# Altium PCB PCB-MM-08-FPS-400 - SDW.PcbDoc
Units mm, origin at the board's own origin, x right, y up, seen from the top; angles counter-clockwise.
Board outline 57.02 x 82.04 mm, 2 copper layers (Top Layer, Bottom Layer); 81 components, 58 nets, 262 pads, 80 vias.
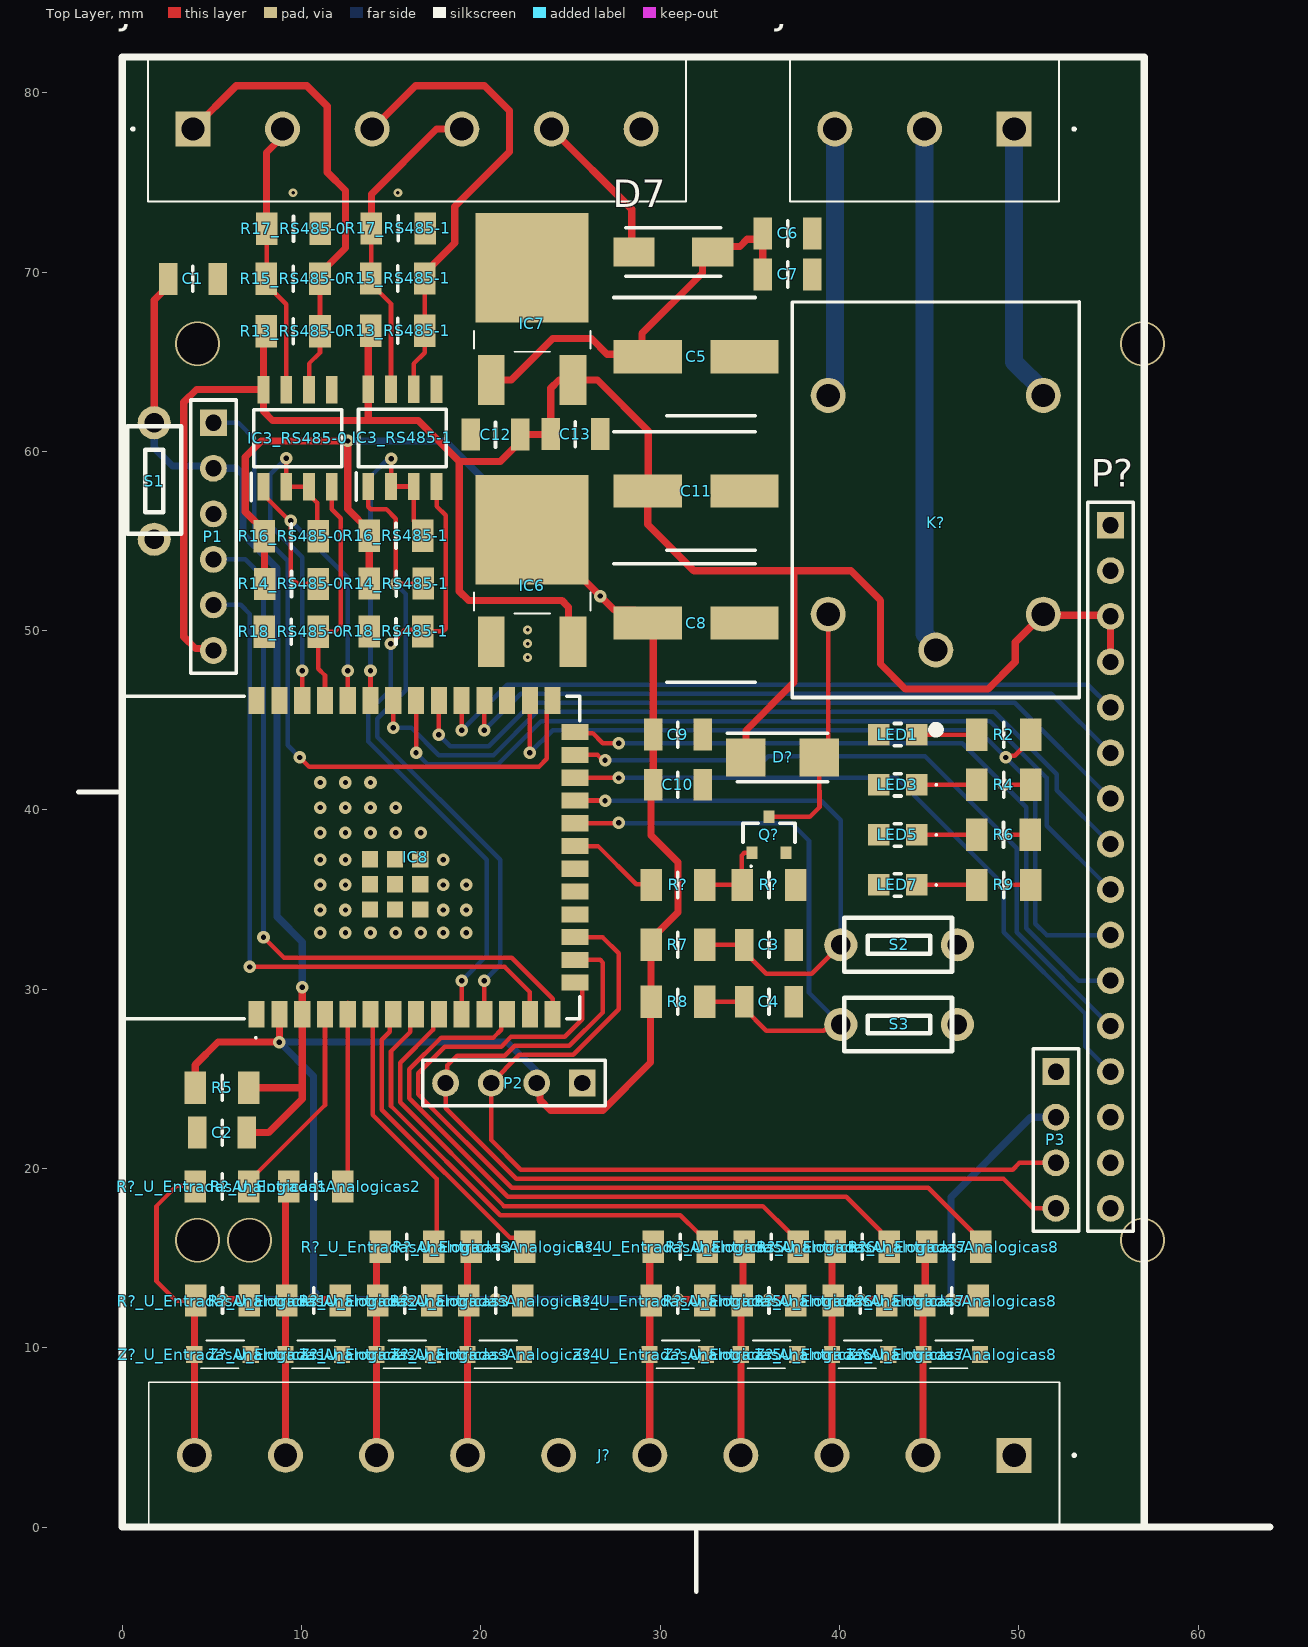
[diagram p0: Top Layer view]
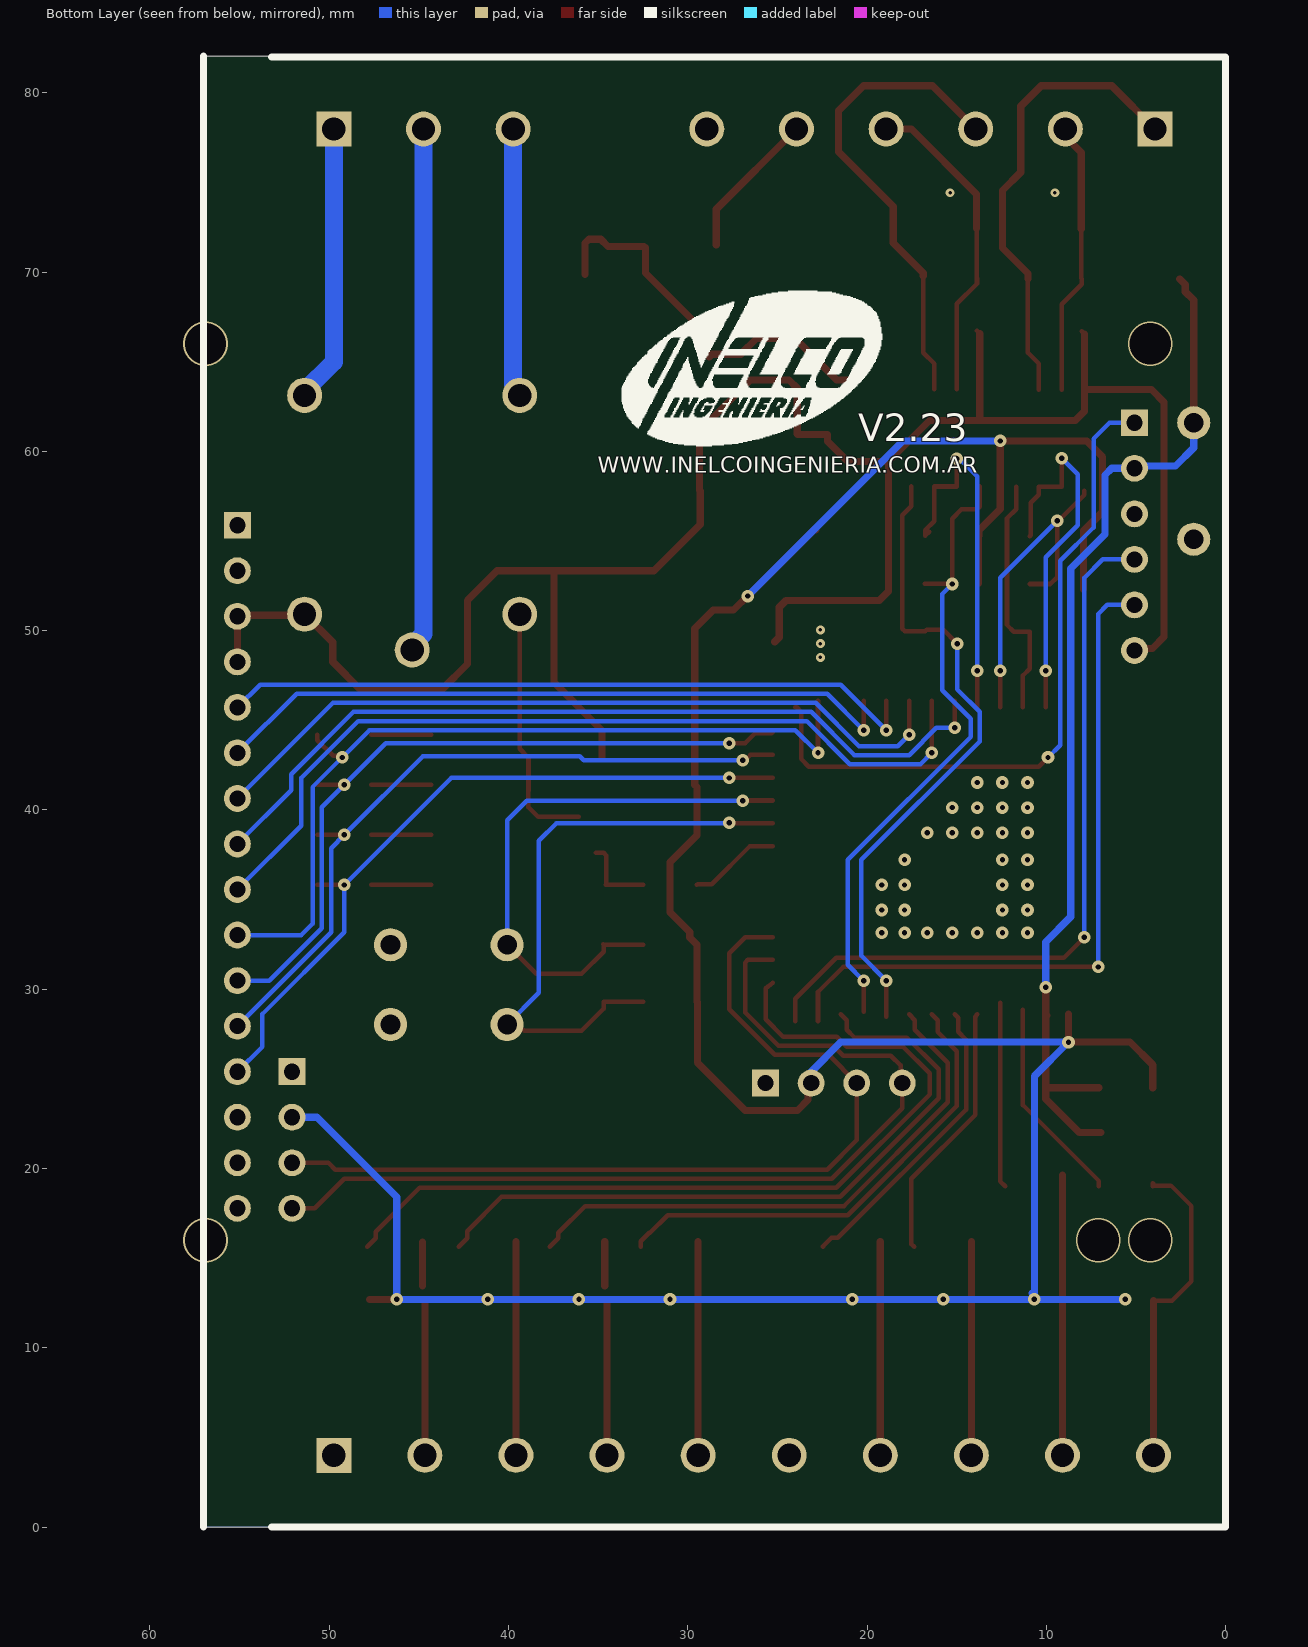
[diagram p1: Bottom Layer view, seen from below]
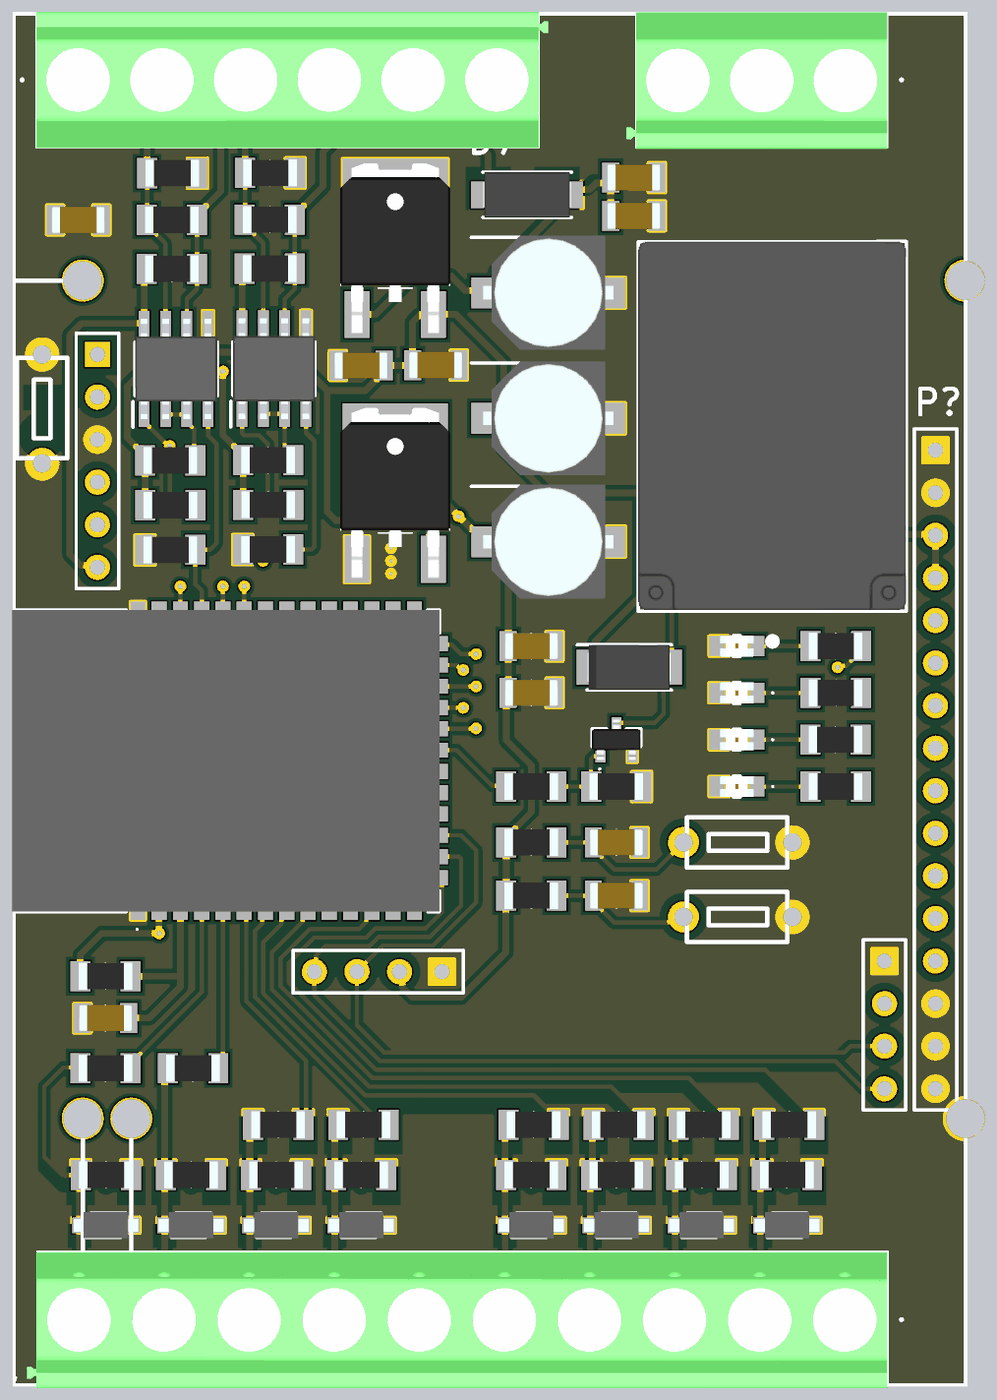
[diagram p2: 3D render of the assembled board from above, using the file's embedded part models]

## Layer stack, top to bottom
Top Solder: solder mask 0.0102, Solder Resist, Dk 3.5
Top Layer: signal copper 0.0356
Dielectric 1: dielectric 0.32, FR-4, Dk 4.8
Bottom Layer: signal copper 0.0356
Bottom Solder: solder mask 0.0102, Solder Resist, Dk 3.5

## Board outline
0,0 57.023,0 57.023,82.042 0,82.042

## Design rules (kind name [scope] priority, off if disabled: settings)
Clearance [All] p1: gap=0.254 ignorepadtopadclearanceinfootprint=FALSE except(0: Arc-Hole Track-Hole SMDPad-Hole THPad-Hole Via-Hole Fill-Hole Poly-Hole Region-Hole Text-Hole; 0.5: THPad-Fill THPad-Poly THPad-Region)
PlaneClearance [All] p1: clearance=2
PlaneConnect [All] p1: planeconnectstyle=Direct reliefexpansion=0.508 reliefentries=4 reliefconductorwidth=0.254 reliefairgap=0.254
PolygonConnect [All] p1: connectstyle=Direct reliefconductorwidth=0.4 reliefentries=4 polygonreliefangle="90 Angle" airgapwidth=0.254
RoomDefinition RS485-0 [InComponentClass('RS485-0')] p1: confinementstyle=ConfineIn formatcopy=TRUE lockcomponents=FALSE outline 6.742,48.262 12.584,48.262 12.584,73.789 6.742,73.789
RoomDefinition RS485-1 [InComponentClass('RS485-1')] p2: confinementstyle=ConfineIn formatcopy=TRUE lockcomponents=FALSE outline 12.584,48.283 18.426,48.283 18.426,73.81 12.584,73.81
RoutingVias [All] p1: holewidth=0.711 width=1.27 viastyle="Through Hole" minholewidth=0.3 minwidth=0.5 maxholewidth=0.711 maxwidth=1.27
SolderMaskExpansion [All] p1: expansion=0.102 istentingtop=FALSE
Width [All] p1: maxlimit=1 minlimit=0.254 preferedwidth=0.4
28 further rules are at their usual default settings.

## Classes and differential pairs
component class U_RELAY: K? Q? R?
channel class EntradasAnalogicas: U_EntradasAnalogicas1 U_EntradasAnalogicas2 U_EntradasAnalogicas3 U_EntradasAnalogicas4 U_EntradasAnalogicas5 U_EntradasAnalogicas6 U_EntradasAnalogicas7 U_EntradasAnalogicas8
component class U_EntradasAnalogicas8: R?_U_EntradasAnalogicas8 Z?_U_EntradasAnalogicas8
component class U_EntradasAnalogicas7: R?_U_EntradasAnalogicas7 Z?_U_EntradasAnalogicas7
component class U_EntradasAnalogicas6: R?_U_EntradasAnalogicas6 Z?_U_EntradasAnalogicas6
component class U_EntradasAnalogicas5: R?_U_EntradasAnalogicas5 Z?_U_EntradasAnalogicas5
component class U_EntradasAnalogicas4: R?_U_EntradasAnalogicas4 Z?_U_EntradasAnalogicas4
component class U_EntradasAnalogicas3: R?_U_EntradasAnalogicas3 Z?_U_EntradasAnalogicas3
component class U_EntradasAnalogicas2: R?_U_EntradasAnalogicas2 Z?_U_EntradasAnalogicas2
component class U_EntradasAnalogicas1: R?_U_EntradasAnalogicas1 Z?_U_EntradasAnalogicas1
component class U_Pulsadores: C1 C2 C3 C4 R5 R7 R8 S1 S2 S3
component class U_Leds: LED1 LED3 LED5 LED7 R2 R4 R6 R9
component class U_Conectores: J? P1 P2 P3
component class "MM-08 FPS-400": IC8 J? P?
component class U_Fuente: C5 C6 C7 C8 C9 C10 C11 C12 C13 D7 IC6 IC7
channel class RS485: RS485-0 RS485-1 RS485-2
component class RS485-0: IC3_RS485-0 R13_RS485-0 R14_RS485-0 R15_RS485-0 R16_RS485-0 R17_RS485-0 R18_RS485-0
component class RS485-1: IC3_RS485-1 R13_RS485-1 R14_RS485-1 R15_RS485-1 R16_RS485-1 R17_RS485-1 R18_RS485-1

## Components (designator, comment, footprint, x,y, rotation, side; value= is the part's Value field where it differs from the comment)
C1 "0.1uF" CAPC3216X100N 3.937,69.62 r0 top
C2 "1uF" CAPC3216X100N 5.564,22 r0 top
C3 "1uF" CAPC3216X100N 36.068,32.477 r180 top
C4 "1uF" CAPC3216X100N 36.068,29.302 r180 top
C5 "100uFX16V" CAPAE660X550N 32.004,65.278 r0 top
C6 "10uF/16V(10%)" CAPC3216X100N 37.103,72.151 r0 top
C7 "0.1uF/16V(10%)" CAPC3216X100N 37.103,69.865 r0 top
C8 "100uFX16V" CAPAE660X550N 32.004,50.419 r0 top
C9 "10uF/16V(10%)" CAPC3216X100N 30.988,44.196 r0 top
C10 "0.1uF/16V(10%)" CAPC3216X100N 30.988,41.402 r0 top
C11 "100uFX16V" CAPAE660X550N 32.004,57.785 r0 top
C12 "10uF/16V(10%)" CAPC3216X100N 20.816,60.933 r180 top
C13 "0.1uF/16V(10%)" CAPC3216X100N 25.273,60.96 r0 top
D7 "M7L" DIONM5327X240N 30.734,71.12 r180 top
D? "M7A" DIOM5027X262N 36.83,42.926 r0 top
IC3_RS485-0 "SN75176AD" SOIC127P600X175-8N 9.779,60.73 r90 top (schematic designator IC3)
IC3_RS485-1 "SN75176AD" SOIC127P600X175-8N 15.621,60.751 r90 top (schematic designator IC3)
IC6 "LD1117DT33CTR" L7805CDTTR 22.86,55.626 r0 top
IC7 "L7805CDT-TR" L7805CDTTR 22.86,70.231 r0 top
IC8 "ESP32-S3-WROOM-1-N4" ESP32S3WROOM1N4 12.753,37.351 r90 top
J? "1729021" 1729021 49.739,77.978 r180 top locked
J? "1729050" 1729050 3.937,77.978 r0 top locked
J? "1729209" 1729209 49.739,4.004 r180 top locked
K? "JS1-12V-F" JS1-12V-F_1 53.37,46.27 r90 top
LED1 "APHCM2012SURCK-F01" APHCM2012SURCKF01 43.249,44.196 r180 top
LED3 "APHCM2012SURCK-F01" APHCM2012SURCKF01 43.249,41.402 r180 top
LED5 "APHCM2012SURCK-F01" APHCM2012SURCKF01 43.249,38.608 r180 top
LED7 "APHCM2012SURCK-F01" APHCM2012SURCKF01 43.249,35.814 r180 top
P1 "Header 6" HDR1X6 5.08,61.595 r270 top
P2 "I2C" HDR1X4 25.654,24.765 r180 top
P3 "RTC" HDR1X4 52.07,25.4 r270 top locked
P? "Header 16" HDR1X16 55.118,55.88 r270 top
Q? "BC817-40" BC81740215 36.068,38.608 r0 top
R2 "1K" RESC3216X75N 49.16,44.196 r180 top
R4 "1K" RESC3216X75N 49.16,41.402 r180 top
R5 "10K" RESC3216X75N 5.564,24.5 r180 top
R6 "1K" RESC3216X75N 49.149,38.608 r180 top
R7 "10K" RESC3216X75N 30.988,32.477 r180 top
R8 "10K" RESC3216X75N 30.988,29.302 r180 top
R9 "1K" RESC3216X75N 49.16,35.814 r180 top
R13_RS485-0 "20K" RESC3216X75N 9.525,66.699 r0 top (schematic designator R13)
R13_RS485-1 "20K" RESC3216X75N 15.367,66.72 r0 top (schematic designator R13)
R14_RS485-0 "10K" RESC3216X75N 9.435,52.602 r0 top (schematic designator R14)
R14_RS485-1 "10K" RESC3216X75N 15.277,52.623 r0 top (schematic designator R14)
R15_RS485-0 "120" RESC3216X75N 9.525,69.62 r180 top (schematic designator R15)
R15_RS485-1 "120" RESC3216X75N 15.367,69.641 r180 top (schematic designator R15)
R16_RS485-0 "1K" RESC3216X75N 9.422,55.269 r0 top (schematic designator R16)
R16_RS485-1 "1K" RESC3216X75N 15.264,55.29 r0 top (schematic designator R16)
R17_RS485-0 "20K" RESC3216X75N 9.549,72.414 r180 top (schematic designator R17)
R17_RS485-1 "20K" RESC3216X75N 15.391,72.435 r180 top (schematic designator R17)
R18_RS485-0 "10K" RESC3216X75N 9.422,49.935 r180 top (schematic designator R18)
R18_RS485-1 "10K" RESC3216X75N 15.264,49.956 r180 top (schematic designator R18)
R? "1K" RESC3216X75N 30.988,35.814 r0 top
R? "10K" RESC3216X75N 36.068,35.814 r180 top
R?_U_EntradasAnalogicas1 "39k" RESC3216X75N 5.564,19 r0 top (schematic designator R?)
R?_U_EntradasAnalogicas1 "2k7" RESC3216X75N 5.588,12.635 r0 top (schematic designator R?)
R?_U_EntradasAnalogicas2 "2k7" RESC3216X75N 10.668,12.635 r0 top (schematic designator R?)
R?_U_EntradasAnalogicas2 "39k" RESC3216X75N 10.795,19 r0 top (schematic designator R?)
R?_U_EntradasAnalogicas3 "2k7" RESC3216X75N 15.748,12.635 r0 top (schematic designator R?)
R?_U_EntradasAnalogicas3 "39k" RESC3216X75N 15.875,15.635 r0 top (schematic designator R?)
R?_U_EntradasAnalogicas4 "39k" RESC3216X75N 20.955,15.635 r0 top (schematic designator R?)
R?_U_EntradasAnalogicas4 "2k7" RESC3216X75N 20.828,12.635 r0 top (schematic designator R?)
R?_U_EntradasAnalogicas5 "39k" RESC3216X75N 31.115,15.635 r0 top (schematic designator R?)
R?_U_EntradasAnalogicas5 "2k7" RESC3216X75N 30.988,12.635 r0 top (schematic designator R?)
R?_U_EntradasAnalogicas6 "39k" RESC3216X75N 36.195,15.635 r0 top (schematic designator R?)
R?_U_EntradasAnalogicas6 "2k7" RESC3216X75N 36.068,12.635 r0 top (schematic designator R?)
R?_U_EntradasAnalogicas7 "2k7" RESC3216X75N 41.148,12.635 r0 top (schematic designator R?)
R?_U_EntradasAnalogicas7 "39k" RESC3216X75N 41.275,15.635 r0 top (schematic designator R?)
R?_U_EntradasAnalogicas8 "2k7" RESC3216X75N 46.252,12.635 r0 top (schematic designator R?)
R?_U_EntradasAnalogicas8 "39k" RESC3216X75N 46.379,15.635 r0 top (schematic designator R?)
S1 "1825965-1" "TAC-SWITCH 2CONT. 3,5X6MM" 1.778,61.595 r270 top
S2 "1825965-1" "TAC-SWITCH 2CONT. 3,5X6MM" 40.074,32.477 r0 top
S3 "1825965-1" "TAC-SWITCH 2CONT. 3,5X6MM" 40.074,28.032 r0 top
Z?_U_EntradasAnalogicas1 "MMSZ5226B-7-F" MMSZ5226B7F 5.588,9.635 r0 top (schematic designator Z?)
Z?_U_EntradasAnalogicas2 "MMSZ5226B-7-F" MMSZ5226B7F 10.668,9.635 r0 top (schematic designator Z?)
Z?_U_EntradasAnalogicas3 "MMSZ5226B-7-F" MMSZ5226B7F 15.748,9.635 r0 top (schematic designator Z?)
Z?_U_EntradasAnalogicas4 "MMSZ5226B-7-F" MMSZ5226B7F 20.828,9.635 r0 top (schematic designator Z?)
Z?_U_EntradasAnalogicas5 "MMSZ5226B-7-F" MMSZ5226B7F 30.988,9.635 r0 top (schematic designator Z?)
Z?_U_EntradasAnalogicas6 "MMSZ5226B-7-F" MMSZ5226B7F 36.068,9.635 r0 top (schematic designator Z?)
Z?_U_EntradasAnalogicas7 "MMSZ5226B-7-F" MMSZ5226B7F 41.148,9.635 r0 top (schematic designator Z?)
Z?_U_EntradasAnalogicas8 "MMSZ5226B-7-F" MMSZ5226B7F 46.252,9.635 r0 top (schematic designator Z?)

## Footprints (in the part's own frame and the unit in brackets; to place one, negate y for a bottom-side part, rotate by r counter-clockwise, add the part's x,y. Pads: shape width x height; smd on the part's side, far side on the other; paste and mask are expansions set on the pad)
1729021 [mm]
  rect 1.95x1.95 hole 1.3: 1(0,0)
  round 1.95 hole 1.3: 2(5,0) 3(10,0)
  silkscreen extent -3.4,-4.05 12.5,4.05, body extent -2.5,-4.04 13.07,4.11, height 10.44
1729050 [mm]
  rect 1.95x1.95 hole 1.3: 1(0,0)
  round 1.95 hole 1.3: 2(5,0) 3(10,0) 4(15,0) 5(20,0) 6(25,0)
  silkscreen extent -3.4,-4.05 27.5,4.05, body extent -2.51,-4.08 28.06,4.07, height 10.53
1729209 [mm]
  rect 1.95x1.95 hole 1.3: 1(0,0)
  round 1.95 hole 1.3: 2(5.08,0) 3(10.16,0) 4(15.24,0) 5(20.32,0) 6(25.4,0) 7(30.48,0) 8(35.56,0) 9(40.64,0) 10(45.72,0)
  silkscreen extent -3.4,-4.08 48.26,4.08, body extent -2.5,-4.01 48.87,4.09, height 10.39
APHCM2012SURCKF01 [mm]
  rect 1.2x1.2 smd: 1(-1.05,0) 2(1.05,0)
  silkscreen extent -2.2,-0.63 0.2,0.63, body extent -1,-0.63 1,0.63, height 0.5
BC81740215 [mm]
  rect 0.6x0.7 smd: 1(-0.95,-1) 2(0.95,-1) 3(0,1)
  silkscreen extent -1.45,-1.8 1.45,0.65, body extent -1.45,-1.2 1.45,1.2, height 0.95
CAPAE660X550N [mm]
  rect 3.8x1.85 smd: 1(-2.7,0) 2(2.7,0)
  silkscreen extent -4.6,-3.3 3.3,3.3, body extent -3.9,-3.4 3.9,3.4, height 5.5
CAPC3216X100N [mm]
  rect 1.02x1.78 smd: 1(-1.38,0) 2(1.38,0)
  silkscreen extent 0,-0.7 0,0.7, body extent -1.6,-0.8 1.6,0.8, height 1
DIOM5027X262N [mm]
  rect 2.2x2.1 smd: 1(-2.05,0) 2(2.05,0)
  silkscreen extent -3.1,-1.35 2.52,1.35, body extent -2.52,-1.35 2.52,1.35, height 2.62
DIONM5327X240N [mm]
  rect 2.3x1.6 smd: 1(-2.2,0) 2(2.2,0)
  silkscreen extent -2.65,-1.35 2.65,1.35, body extent -2.65,-1.35 2.65,1.35, height 2.4
ESP32S3WROOM1N4 [mm]
  rect 1.5x0.9 smd: 1(-8.75,5.26) 2(-8.75,3.99) 3(-8.75,2.72) 4(-8.75,1.45) 5(-8.75,0.18) 6(-8.75,-1.09) 7(-8.75,-2.36) 8(-8.75,-3.63) 9(-8.75,-4.9) 10(-8.75,-6.17) 11(-8.75,-7.44) 12(-8.75,-8.71) 13(-8.75,-9.98) 14(-8.75,-11.25) 27(8.75,-11.25) 28(8.75,-9.98) 29(8.75,-8.71) 30(8.75,-7.44) 31(8.75,-6.17) 32(8.75,-4.9) 33(8.75,-3.63) 34(8.75,-2.36) 35(8.75,-1.09) 36(8.75,0.18) 37(8.75,1.45) 38(8.75,2.72) 39(8.75,3.99) 40(8.75,5.26)
  rect 0.9x1.5 smd: 15(-6.985,-12.5) 16(-5.715,-12.5) 17(-4.445,-12.5) 18(-3.175,-12.5) 19(-1.905,-12.5) 20(-0.635,-12.5) 21(0.635,-12.5) 22(1.905,-12.5) 23(3.175,-12.5) 24(4.445,-12.5) 25(5.715,-12.5) 26(6.985,-12.5)
  rect 0.9x0.9 smd: 41(-1.5,-2.46) 42(-2.9,-1.06) 43(-2.9,-2.46) 44(-2.9,-3.86) 45(-1.5,-3.86) 46(-0.1,-3.86) 47(-0.1,-2.46) 48(-0.1,-1.06) 49(-1.5,-1.06)
  silkscreen extent -10.1,-12.75 9,12.75, body extent -9,-12.75 9,12.75, height 3.35
HDR1X4 [mm] "Connector; Header; 4 Position"
  rect 1.5x1.5 hole 0.9: 1(0,0)
  round 1.5 hole 0.9: 2(2.54,0) 3(5.08,0) 4(7.62,0)
  silkscreen extent -1.27,-1.27 8.89,1.27
HDR1X6 [mm] "Connector; Header; 6 Position"
  rect 1.5x1.5 hole 0.9: 1(0,0)
  round 1.5 hole 0.9: 2(2.54,0) 3(5.08,0) 4(7.62,0) 5(10.16,0) 6(12.7,0)
  silkscreen extent -1.27,-1.27 13.97,1.27
HDR1X16 [mm] "Connector; Header; 16 Position"
  rect 1.5x1.5 hole 0.9: 1(0,0)
  round 1.5 hole 0.9: 2(2.54,0) 3(5.08,0) 4(7.62,0) 5(10.16,0) 6(12.7,0) 7(15.24,0) 8(17.78,0) 9(20.32,0) 10(22.86,0) 11(25.4,0) 12(27.94,0) 13(30.48,0) 14(33.02,0) 15(35.56,0) 16(38.1,0)
  silkscreen extent -1.27,-1.27 39.37,1.27
JS1-12V-F_1 [mm]
  round 1.95 hole 1.3: 1(2.649,8) 2(4.649,14) 3(16.849,14) 4(16.849,2) 5(4.649,2)
  silkscreen extent -1.98,0 22.07,16, body extent 0.07,0 22.07,16, height 16.9
L7805CDTTR [mm]
  rect 1.5x2.8 smd: 1(-2.286,-6.25) 3(2.286,-6.25)
  rect 6.3x6.1 smd: 2(0,0)
  silkscreen extent -3.25,-4.68 3.25,-3.5, body extent -3.3,-7.38 3.3,2.78, height 2.63
MMSZ5226B7F [mm]
  rect 0.9x0.95 smd: 1(-1.575,0) 2(1.575,0)
  silkscreen extent -1.2,-0.77 1.2,0.77, body extent -1.93,-0.77 1.93,0.77, height 1.55
RESC3216X75N [mm]
  rect 1.2x1.8 smd: 1(-1.5,0) 2(1.5,0)
  silkscreen extent 0,-0.7 0,0.7, body extent -1.6,-0.8 1.6,0.8, height 0.75
SOIC127P600X175-8N [mm]
  rect 1.525x0.65 smd: 1(-2.712,1.905) 2(-2.712,0.635) 3(-2.712,-0.635) 4(-2.712,-1.905) 5(2.712,-1.905) 6(2.712,-0.635) 7(2.712,0.635) 8(2.712,1.905)
  silkscreen extent -3.47,-2.45 1.6,2.58, body extent -3,-2.45 3,2.45, height 1.75
"TAC-SWITCH 2CONT. 3,5X6MM" [mm]
  round 1.85 hole 1.1: 1(0,0) 2(6.5,0)
  silkscreen extent 0.2,-1.5 6.2,1.5

## Part data
C1 C2 C3 C4 C6 C7 C9 C10 C12 C13: library part CL31B104KBCNNNC, "100NFX50V X7R 10% CER.MULT. SMD 1206", Manufacturer_Name="Samsung Electro-Mechanics", Mouser Part Number=187-CL31B104KBCNNNC, Arrow Part Number=CL31B104KBCNNNC, Arrow Price/Stock=https://www.arrow.com/en/products/cl31b104kbcnnnc/samsung-electro-mechanics?region=nac, Datasheet Link=https://datasheet.datasheetarchive.com/originals/distributors/Datasheets_SAMA/0fdb6a11e020a7299f4d0713dd2bd7ee.pdf, Height=1mm, Manufacturer_Part_Number=CL31B104KBCNNNC, Mouser Price/Stock=https://www.mouser.co.uk/ProductDetail/Samsung-Electro-Mechanics/CL31B104KBCNNNC?qs=349EhDEZ59oHABbyGq1iKA%3D%3D
C5 C8 C11: library part NACE101M16V6.3X5.5TR13F, "100UFX16V 20%. 6.3x5.4 ELE.RAD.SMD", Manufacturer_Name="NIC Components", Arrow Part Number=NACE101M16V6.3X5.5TR13F, Arrow Price/Stock=https://www.arrow.com/en/products/nace101m16v6.3x5.5tr13f/nic-components, Datasheet Link=http://uk.rs-online.com/web/p/products/7379631, Height=5.5mm, Manufacturer_Part_Number=NACE101M16V6.3X5.5TR13F
D7: "Diode", Manufacturer_Name=Diotec, Mouser Part Number=637-M7L, Datasheet Link=https://www.mouser.in/ProductDetail/Diotec-Semiconductor/M7L?qs=Wj%2FVkw3K%252BMDMylK9y%2FQg4g%3D%3D, Height=2.4mm, Manufacturer_Part_Number=M7L, Mouser Price/Stock=https://www.mouser.co.uk/ProductDetail/Diotec-Semiconductor/M7L?qs=Wj%2FVkw3K%252BMDMylK9y%2FQg4g%3D%3D
D?: "Diode", Manufacturer_Name="HY Electronic", Height=2.62mm, Manufacturer_Part_Number=M7A
IC3_RS485-0 IC3_RS485-1: "Integrated Circuit", Manufacturer_Name="Texas Instruments", Mouser Part Number=595-SN75176AD, Arrow Part Number=SN75176AD, Arrow Price/Stock=https://www.arrow.com/en/products/sn75176ad/texas-instruments?region=nac, Datasheet Link=http://www.ti.com/lit/ds/symlink/sn75176a.pdf, Height=1.75mm, Manufacturer_Part_Number=SN75176AD, Mouser Price/Stock=https://www.mouser.co.uk/ProductDetail/Texas-Instruments/SN75176AD?qs=FetendrIl6upbSVFRObzhQ%3D%3D
IC6: "TO-252-3/DPACK 0.95A 3.3V", Manufacturer_Name=STMicroelectronics, Mouser Part Number=511-LD1117DT33C-TR, Arrow Part Number=LD1117DT33CTR, Arrow Price/Stock=https://www.arrow.com/en/products/ld1117dt33ctr/stmicroelectronics?region=nac, Datasheet Link=https://www.st.com/resource/en/datasheet/ld1117.pdf, Height=2.48mm, Manufacturer_Part_Number=LD1117DT33CTR, Mouser Price/Stock=https://www.mouser.co.uk/ProductDetail/STMicroelectronics/LD1117DT33CTR?qs=rUxiu3TV3%2FNm%2FOyb7vJzpg%3D%3D
IC7: "Integrated Circuit", Manufacturer_Name=STMicroelectronics, Mouser Part Number=511-L7805CDT-TR, Arrow Part Number=L7805CDT-TR, Arrow Price/Stock=https://www.arrow.com/en/products/l7805cdt-tr/stmicroelectronics?region=europe, Datasheet Link=https://componentsearchengine.com/Datasheets/2/L7805CDT-TR.pdf, Height=2.63mm, Manufacturer_Part_Number=L7805CDT-TR, Mouser Price/Stock=https://www.mouser.co.uk/ProductDetail/STMicroelectronics/L7805CDT-TR?qs=gq%2F78KzUDX67VndS%2FbSB4Q%3D%3D
IC8: "Integrated Circuit", Manufacturer_Name="Espressif Systems", Mouser Part Number=356-ESP32-S3WROOM1N4, Datasheet Link=https://www.espressif.com/sites/default/files/documentation/esp32-s3-wroom-1_wroom-1u_datasheet_en.pdf, Height=3.25mm, Manufacturer_Part_Number=ESP32-S3-WROOM-1-N4, Mouser Price/Stock=https://www.mouser.co.uk/ProductDetail/Espressif-Systems/ESP32-S3-WROOM-1-N4?qs=Li%252BoUPsLEnsO%2FkiJOUK0FQ%3D%3D
J?: "Connector", Manufacturer_Name="Phoenix Contact", Mouser Part Number=651-1729021, Arrow Part Number=1729021, Arrow Price/Stock=https://www.arrow.com/en/products/1729021/phoenix-contact?region=nac, Datasheet Link=http://www.phoenixcontact.com/de/produkte/1729021/pdf, Height=10.15mm, Manufacturer_Part_Number=1729021, Mouser Price/Stock=https://www.mouser.co.uk/ProductDetail/Phoenix-Contact/1729021?qs=zFpBqiaOpnwhKtz3PKBNAQ%3D%3D
J?: "Connector", Manufacturer_Name="Phoenix Contact", Mouser Part Number=651-1729050, Arrow Part Number=1729050, Arrow Price/Stock=https://www.arrow.com/en/products/1729050/phoenix-contact?region=nac, Datasheet Link=http://www.phoenixcontact.com/de/produkte/1729050/pdf, Height=10.15mm, Manufacturer_Part_Number=1729050, Mouser Price/Stock=https://www.mouser.co.uk/ProductDetail/Phoenix-Contact/1729050?qs=cq3Rj917t3laRrRfXpB0kg%3D%3D
J?: "Connector", Manufacturer_Name="Phoenix Contact", Mouser Part Number=651-1729209, Datasheet Link=http://www.phoenixcontact.com/de/produkte/1729209/pdf, Height=10.15mm, Manufacturer_Part_Number=1729209, Mouser Price/Stock=https://www.mouser.co.uk/ProductDetail/Phoenix-Contact/1729209?qs=DAHzmYU9cu26iNG3nw7bXQ%3D%3D
K?: "Relay or Contactor", Manufacturer_Name=Panasonic, Mouser Part Number=769-JS1-12V-F, Arrow Part Number=JS1-12V-F, Arrow Price/Stock=https://www.arrow.com/en/products/js1-12v-f/panasonic, Datasheet Link=https://datasheet.datasheetarchive.com/originals/distributors/Datasheets-24/DSA-473864.pdf, Manufacturer_Part_Number=JS1-12V-F, Mouser Price/Stock=https://www.mouser.co.uk/ProductDetail/Panasonic-Industrial-Devices/JS1-12V-F?qs=UO%2Fx91QLkSAl%252Bp0dnjREtA%3D%3D
LED1 LED3 LED5 LED7: "LED", Manufacturer_Name=Kingbright, Mouser Part Number=604-APHCM2012SURCK, Arrow Part Number=APHCM2012SURCK-F01, Arrow Price/Stock=https://www.arrow.com/en/products/aphcm2012surck-f01/kingbright?region=nac, Datasheet Link=https://componentsearchengine.com/Datasheets/1/APHCM2012SURCK-F01.pdf, Height=0.5mm, Manufacturer_Part_Number=APHCM2012SURCK-F01, Mouser Price/Stock=https://www.mouser.co.uk/ProductDetail/Kingbright/APHCM2012SURCK-F01?qs=qqKal61G0Kww4v8qUa%2Fyzg%3D%3D
P1: "Header, 6-Pin", LatestRevisionDate=17-Jul-2002, LatestRevisionNote="Re-released for DXP Platform.", Publisher="Altium Limited"
P2 P3: library part "Header 4", "Header, 4-Pin", LatestRevisionDate=17-Jul-2002, LatestRevisionNote="Re-released for DXP Platform.", Publisher="Altium Limited"
P?: "Header, 16-Pin", LatestRevisionDate=17-Jul-2002, LatestRevisionNote="Re-released for DXP Platform.", Publisher="Altium Limited"
Q?: library part BC817-40,215, "Transistor BJT NPN", Manufacturer_Name=Nexperia, Mouser Part Number=771-BC817-40-T/R, Arrow Part Number=BC817-40,215, Arrow Price/Stock=https://www.arrow.com/en/products/bc817-40215/nexperia?region=nac, Datasheet Link=https://assets.nexperia.com/documents/data-sheet/BC817_SER.pdf, Height=1.1mm, Manufacturer_Part_Number=BC817-40,215, Mouser Price/Stock=https://www.mouser.co.uk/ProductDetail/Nexperia/BC817-40215?qs=me8TqzrmIYU%252B245p8hOLaQ%3D%3D
R2 R4 R5 R6 R7 R8 R9 R13_RS485-0 R13_RS485-1 R14_RS485-0 R14_RS485-1 R15_RS485-0 R15_RS485-1 R16_RS485-0 R16_RS485-1 R17_RS485-0 R17_RS485-1 R18_RS485-0 R18_RS485-1 R? R? R?_U_EntradasAnalogicas1 R?_U_EntradasAnalogicas1 R?_U_EntradasAnalogicas2 R?_U_EntradasAnalogicas2 R?_U_EntradasAnalogicas3 R?_U_EntradasAnalogicas3 R?_U_EntradasAnalogicas4 R?_U_EntradasAnalogicas4 R?_U_EntradasAnalogicas5 R?_U_EntradasAnalogicas5 R?_U_EntradasAnalogicas6 R?_U_EntradasAnalogicas6 R?_U_EntradasAnalogicas7 R?_U_EntradasAnalogicas7 R?_U_EntradasAnalogicas8 R?_U_EntradasAnalogicas8: library part CR1206-F_-2R00ELF, "Resistor", Manufacturer_Name=Bourns, Manufacturer_Part_Number=CR1206-F/-2R00ELF, Mouser Part Number=652-CR1206-F/2R00ELF, Height=0.75mm, Mouser Price/Stock=https://www.mouser.co.uk/ProductDetail/Bourns/CR1206-F-2R00ELF?qs=W%2FMpXkg%252BdQ47Z%2FeZv1nDSg%3D%3D
S1 S2 S3: "Switch", Manufacturer_Name="TE Connectivity", Arrow Part Number=1825965-1, Arrow Price/Stock=https://www.arrow.com/en/products/1825965-1/te-connectivity?region=nac, Datasheet Link=https://www.arrow.com/en/products/1825965-1/te-connectivity, Height=5mm, Manufacturer_Part_Number=1825965-1
Z?_U_EntradasAnalogicas1 Z?_U_EntradasAnalogicas2 Z?_U_EntradasAnalogicas3 Z?_U_EntradasAnalogicas4 Z?_U_EntradasAnalogicas5 Z?_U_EntradasAnalogicas6 Z?_U_EntradasAnalogicas7 Z?_U_EntradasAnalogicas8: "Zener Diode", Manufacturer_Name="Diodes Inc.", Mouser Part Number=621-MMSZ5226B-F, Arrow Part Number=MMSZ5226B-7-F, Arrow Price/Stock=https://www.arrow.com/en/products/mmsz5226b-7-f/diodes-incorporated?region=europe, Datasheet Link=https://www.arrow.com/en/products/mmsz5226b-7-f/diodes-incorporated, Height=1.45mm, Manufacturer_Part_Number=MMSZ5226B-7-F, Mouser Price/Stock=https://www.mouser.co.uk/ProductDetail/Diodes-Incorporated/MMSZ5226B-7-F?qs=KJYV4z76NkUw6Rc9yJaACw%3D%3D

## Via types
v1: diameter 0.7, hole 0.3, Top Layer to Bottom Layer, 70 vias
v2: diameter 0.5, hole 0.2, Top Layer to Bottom Layer, 5 vias
v3: diameter 2.5, hole 2.3, Top Layer to Bottom Layer, 5 vias

## Nets (pads, with @x,y where several pads share a name; then routed paths per layer and width w, separated by ;. In a path a pad name is that pad's centre, name@x,y a point inside that pad or via, vN(x,y) a via of type N, cw(c..) or ccw(c..) an arc to the next point about the centre after c; other vN are vias at no path point)
+3V3: C8.1 C9.1 C10.1 IC6.2 IC8.2 P2.2 P3.2 R5.2 R7.2 R8.2 R14_RS485-0.1 R14_RS485-1.1 R16_RS485-0.1 R16_RS485-1.1 R?_U_EntradasAnalogicas1.2@7.088,12.635 R?_U_EntradasAnalogicas2.2@12.168,12.635 R?_U_EntradasAnalogicas3.2@17.248,12.635 R?_U_EntradasAnalogicas4.2@22.328,12.635 R?_U_EntradasAnalogicas5.2@32.488,12.635 R?_U_EntradasAnalogicas6.2@37.568,12.635 R?_U_EntradasAnalogicas7.2@42.648,12.635 R?_U_EntradasAnalogicas8.2@47.752,12.635 | length 187.8
  Top Layer w0.4: R5.2 4.064,25.781 5.334,27.051 v1(8.763,27.051) IC8.2 ; v1(5.588,12.7) R?_U_EntradasAnalogicas1.2@7.088,12.7 ; R14_RS485-0.1@7.935,52.302 R14_RS485-0.1 7.935,55.256 R16_RS485-0.1 7.922,55.569 6.858,56.633 6.858,59.69 7.747,60.579 v1(12.573,60.579) 12.573,56.781 13.764,55.59 R16_RS485-1.1 13.777,55.277 R14_RS485-1.1 ; v1(10.668,12.7) R?_U_EntradasAnalogicas2.2@12.168,12.7 ; v1(15.748,12.7) R?_U_EntradasAnalogicas3.2@17.248,12.7 ; v1(20.828,12.7) R?_U_EntradasAnalogicas4.2@22.328,12.7 ; IC6.2 22.96,55.626 v1(26.656,51.929) 27.442,51.144 28.579,51.144 C8.1 29.608,50.115 C9.1 C10.1 29.488,41.282 29.488,38.584 30.988,37.084 30.988,34.29 29.888,33.19 29.888,32.877 R7.2 R8.2 29.464,29.278 29.464,25.908 26.797,23.241 23.876,23.241 23.288,23.829 23.288,24.591 P2.2 ; v1(30.988,12.7) R?_U_EntradasAnalogicas5.2@32.488,12.7 ; v1(36.068,12.7) R?_U_EntradasAnalogicas6.2@37.568,12.7 ; v1(41.148,12.7) R?_U_EntradasAnalogicas7.2@42.648,12.7 ; v1(46.228,12.7) R?_U_EntradasAnalogicas8.2@47.752,12.7
  Bottom Layer w0.4: v1(5.588,12.7) v1(10.668,12.7) 10.668,25.146 v1(8.763,27.051) 21.463,27.051 P2.2@23.114,25.4 ; v1@10.725,12.63 v1@10.795,12.7 ; 10.795,13.039 10.725,12.97 10.725,12.77 v1@10.795,12.7 ; v1(12.573,60.579) 18.007,60.579 v1(26.656,51.929) ; P3.2 50.673,22.86 46.228,18.415 v1(46.228,12.7) v1(41.148,12.7) v1(36.068,12.7) v1(30.988,12.7) v1(20.828,12.7) v1(15.748,12.7) v1@10.795,12.7
+5V: C11.1 C12.1 C13.1 D?.1 IC3_RS485-0.8 IC3_RS485-1.8 IC6.3 IC7.3 K?.5 P1.6 P?.3 P?.4 R13_RS485-0.1 R13_RS485-1.1 | length 125.5
  Top Layer w0.254: R13_RS485-0.1@7.874,66.548 R13_RS485-0.1 ; R13_RS485-1.1@13.716,66.569 R13_RS485-1.1
  Top Layer w0.4: P1.6 4.97,49.005 4.081,49.005 3.429,49.657 3.429,62.738 4.133,63.442 IC3_RS485-0.8 7.874,62.23 8.382,61.722 13.716,61.722 16.51,61.722 18.796,59.436 ; IC3_RS485-0.8@7.874,63.502 R13_RS485-0.1@7.874,66.548 ; 13.716,61.872 IC3_RS485-1.8 R13_RS485-1.1@13.716,66.569 ; IC6.3 24.892,49.63 24.892,51.308 24.511,51.689 19.304,51.689 18.796,52.197 18.796,59.436 ; D?.1 34.78,44.432 37.465,47.117 37.465,53.34 ; P?.4 P?.3@55.118,50.201 ; P?.3@55.499,50.8 55.44,50.859 51.429,50.859 K?.5 49.804,49.353 49.804,48.26 48.28,46.736 43.688,46.736 42.291,48.133 42.291,51.689 40.64,53.34 37.465,53.34 ; 18.796,59.436 21.079,59.436 22.196,60.553 C12.1 23.866,60.933 C13.1 23.893,63.517 24.357,63.981 IC7.3 26.496,63.981 29.337,61.14 29.337,57.818 C11.1 29.304,55.913 31.877,53.34 37.465,53.34
+12V: C5.1 C6.1 C7.1 D7.1 IC7.1 | length 22.5
  Top Layer w0.4: IC7.1 21.69,63.981 24.003,66.294 26.162,66.294 27.038,65.418 28.656,65.418 28.796,65.278 28.977,65.459 28.977,66.569 32.362,69.954 32.362,71.351 32.439,71.428 34.45,71.428 34.847,71.825 35.511,71.825 35.723,71.613 C7.1
+12VB: D7.2 J?.5@23.937,77.978 | length 8.3
  Top Layer w0.4: J?.5@23.937,77.978 28.412,73.503 D7.2@28.412,71.501
A_0: IC3_RS485-0.6 J?.1@3.937,77.978 R13_RS485-0.2 R15_RS485-0.1 | length 26
  Top Layer w0.254: IC3_RS485-0.6 10.414,64.897 11.025,65.508 R13_RS485-0.2 R15_RS485-0.1
  Top Layer w0.4: J?.1@3.937,77.978 6.35,80.391 10.287,80.391 11.43,79.248 11.43,75.565 12.446,74.549 12.446,71.341 11.025,69.92 R15_RS485-0.1
A_1: IC3_RS485-1.6 J?.3@13.937,77.978 R13_RS485-1.2 R15_RS485-1.1 | length 27
  Top Layer w0.254: IC3_RS485-1.6 16.256,64.897 16.867,65.508 R13_RS485-1.2 R15_RS485-1.1 R15_RS485-1.1@16.867,69.791
  Top Layer w0.4: J?.3@13.937,77.978 16.35,80.391 20.193,80.391 21.59,78.994 21.59,76.708 18.542,73.66 18.542,71.616 16.867,69.941 R15_RS485-1.1@16.867,69.791
AI_1: IC8.4 R?_U_EntradasAnalogicas1.2@7.064,19 | length 11.6
  Top Layer w0.254: R?_U_EntradasAnalogicas1.2@7.064,19 7.064,19.3 11.303,23.539 IC8.4@11.303,28.855
AI_2: IC8.5 R?_U_EntradasAnalogicas2.2@12.295,19 | length 10.4
  Top Layer w0.254: R?_U_EntradasAnalogicas2.2@12.295,19 12.573,19.278 IC8.5@12.573,29.236
AI_3: IC8.6 R?_U_EntradasAnalogicas3.2@17.375,15.635 | length 14.6
  Top Layer w0.254: IC8.6 13.97,28.474 13.97,22.987 17.526,19.431 17.526,15.786 R?_U_EntradasAnalogicas3.2@17.375,15.635
AI_4: IC8.7 R?_U_EntradasAnalogicas4.2@22.455,15.635 | length 16.7
  Top Layer w0.254: IC8.7 14.919,28.407 14.919,27.619 14.478,27.178 14.478,23.277 21.626,16.129 21.982,16.129 22.455,15.656 R?_U_EntradasAnalogicas4.2@22.455,15.635
AI_5: IC8.8 R?_U_EntradasAnalogicas5.2@32.615,15.635 | length 26.7
  Top Layer w0.254: 14.986,23.487 21.074,17.399 31.115,17.399 32.106,16.408 32.142,16.408 32.615,15.935 R?_U_EntradasAnalogicas5.2@32.615,15.635 ; 14.986,23.495 14.986,26.543 16.06,27.617 16.06,28.278 IC8.8
AI_6: IC8.9 R?_U_EntradasAnalogicas6.2@37.695,15.635 | length 31.5
  Top Layer w0.254: IC8.9 17.33,28.278 17.33,27.744 15.494,25.908 15.494,23.698 21.285,17.907 35.723,17.907 37.222,16.408 37.222,16.108 R?_U_EntradasAnalogicas6.2@37.695,15.635
AI_7: IC8.12 R?_U_EntradasAnalogicas7.2@42.775,15.635 | length 39.1
  Top Layer w0.254: IC8.12 21.14,28.278 21.14,27.744 20.701,27.305 17.78,27.305 16.002,25.527 16.002,23.908 21.495,18.415 40.386,18.415 42.302,16.499 42.302,16.108 R?_U_EntradasAnalogicas7.2@42.775,15.635
AI_8: IC8.15 R?_U_EntradasAnalogicas8.2@47.879,15.635 | length 48.9
  Top Layer w0.254: IC8.15 25.654,30.043 25.654,28.321 24.683,27.35 21.679,27.35 21.126,26.797 17.99,26.797 16.51,25.317 16.51,24.13 21.717,18.923 44.958,18.923 47.406,16.475 47.406,16.108 R?_U_EntradasAnalogicas8.2@47.879,15.635
AIB_1: J?.10 R?_U_EntradasAnalogicas1.1 Z?_U_EntradasAnalogicas1.1 | length 17.2
  Top Layer w0.254: R?_U_EntradasAnalogicas1.1@4.019,12.631 2.99,12.631 1.905,13.716 1.905,17.907 3.048,19.05 3.937,19.05 4.064,19.177 R?_U_EntradasAnalogicas1.1@4.064,19
  Top Layer w0.4: 4.019,5.02 R?_U_EntradasAnalogicas1.1@4.019,12.631
AIB_2: J?.9 R?_U_EntradasAnalogicas2.1 Z?_U_EntradasAnalogicas2.1 | length 15.6
  Top Layer w0.4: J?.9 R?_U_EntradasAnalogicas2.1@9.099,19.635
AIB_3: J?.8 R?_U_EntradasAnalogicas3.1 Z?_U_EntradasAnalogicas3.1 | length 11.9
  Top Layer w0.4: J?.8 R?_U_EntradasAnalogicas3.1@14.179,15.933
AIB_4: J?.7 R?_U_EntradasAnalogicas4.1 Z?_U_EntradasAnalogicas4.1 | length 11.9
  Top Layer w0.4: J?.7 R?_U_EntradasAnalogicas4.1@19.259,15.933
AIB_5: J?.5@29.419,4.004 R?_U_EntradasAnalogicas5.1 Z?_U_EntradasAnalogicas5.1 | length 11.9
  Top Layer w0.4: J?.5@29.419,4.004 R?_U_EntradasAnalogicas5.1@29.419,15.933
AIB_6: J?.4@34.499,4.004 R?_U_EntradasAnalogicas6.1 Z?_U_EntradasAnalogicas6.1 | length 11.2
  Top Layer w0.4: J?.4@34.499,4.004 34.499,9.779 R?_U_EntradasAnalogicas6.1@34.499,12.7 ; R?_U_EntradasAnalogicas6.1@34.626,13.462 R?_U_EntradasAnalogicas6.1@34.626,15.933
AIB_7: J?.3@39.579,4.004 R?_U_EntradasAnalogicas7.1 Z?_U_EntradasAnalogicas7.1 | length 11.9
  Top Layer w0.4: J?.3@39.579,4.004 R?_U_EntradasAnalogicas7.1@39.579,15.933
AIB_8: J?.2@44.659,4.004 R?_U_EntradasAnalogicas8.1 Z?_U_EntradasAnalogicas8.1 | length 11.1
  Top Layer w0.4: J?.2@44.659,4.004 44.659,9.779 R?_U_EntradasAnalogicas8.1@44.659,12.7 ; R?_U_EntradasAnalogicas8.1@44.786,13.462 R?_U_EntradasAnalogicas8.1@44.786,15.909
B_0: IC3_RS485-0.7 J?.2@8.937,77.978 R15_RS485-0.2 R17_RS485-0.2 | length 15.4
  Top Layer w0.254: R17_RS485-0.2 8.049,69.644 R15_RS485-0.2 8.025,69.32 9.144,68.201 IC3_RS485-0.7
  Top Layer w0.4: R17_RS485-0.2 8.049,76.671 8.937,77.559 J?.2@8.937,77.978
B_1: IC3_RS485-1.7 J?.4@18.937,77.978 R15_RS485-1.2 R17_RS485-1.2 | length 17.9
  Top Layer w0.254: R17_RS485-1.2 13.891,69.665 R15_RS485-1.2 13.867,69.341 14.986,68.222 IC3_RS485-1.7
  Top Layer w0.4: R17_RS485-1.2 13.891,74.343 17.526,77.978 J?.4@18.937,77.978
CHIP-EN: C1.1 C2.2 IC8.3 P1.2 R5.1 S1.1 | length 58.4
  Top Layer w0.4: S1.1 1.778,68.436 2.247,68.905 2.247,69.31 C1.1 ; C2.2 8.157,22 10.033,23.876 10.033,24.507 ; R5.1 10.026,24.5 10.033,24.507 ; IC8.3@9.973,28.541 IC8.3 ; v1(10.033,30.099) 10.033,24.507
  Bottom Layer w0.4: S1.1 1.778,60.198 2.794,59.182 4.953,59.182 P1.2 6.35,59.055 6.731,58.674 6.731,55.372 8.636,53.467 8.636,34.036 10.033,32.639 v1(10.033,30.099)
EN-CM: IC8.31 P?.5 | length 39.4
  Top Layer w0.254: v1(18.923,44.45) IC8.31
  Bottom Layer w0.254: v1(18.923,44.45) 21.463,46.99 53.848,46.99 P?.5
GND: C1.2 C2.1 C3.1 C4.1 C5.2 C6.2 C7.2 C8.2 C9.2 C10.2 C11.2 C12.2 C13.2 IC3_RS485-0.5 IC3_RS485-1.5 IC6.1 IC7.2 IC8.1 IC8.40 IC8.41 IC8.42 IC8.43 IC8.44 IC8.45 IC8.46 IC8.47 IC8.48 IC8.49 J?.1@49.739,4.004 J?.6 LED1.2 LED3.2 LED5.2 LED7.2 P1.3 P2.1 P3.1 P?.1 P?.2 P?.14 P?.15 P?.16 Q?.2 R17_RS485-0.1 R17_RS485-1.1 R18_RS485-0.2 R18_RS485-1.2 R?.1@37.568,35.814 S1.2 S2.2 S3.2 Z?_U_EntradasAnalogicas1.2 Z?_U_EntradasAnalogicas2.2 Z?_U_EntradasAnalogicas3.2 Z?_U_EntradasAnalogicas4.2 Z?_U_EntradasAnalogicas5.2 Z?_U_EntradasAnalogicas6.2 Z?_U_EntradasAnalogicas7.2 Z?_U_EntradasAnalogicas8.2
  other v1: 11.049,33.147 12.446,33.147 13.843,33.147 15.24,33.147 16.637,33.147 17.907,33.147 19.177,33.147 11.049,34.417 12.446,34.417 17.907,34.417 19.177,34.417 11.049,35.814 12.446,35.814 17.907,35.814 19.177,35.814 11.049,37.211 12.446,37.211 17.907,37.211 11.049,38.735 12.446,38.735 13.843,38.735 15.24,38.735 16.637,38.735 11.049,40.132 12.446,40.132 13.843,40.132 15.24,40.132 11.049,41.529 12.446,41.529 13.843,41.529
  other v2: 22.606,48.514 22.606,49.276 22.606,50.038 9.525,74.422 15.367,74.422
  other v3: 56.9,16
GPIO0: IC8.27 P1.1 | length 38.7
  Top Layer w0.254: v1(9.906,42.926) 10.414,42.418 23.241,42.418 23.68,42.857 23.68,45.478 23.922,45.72 IC8.27@24.003,45.72
  Bottom Layer w0.254: P1.1 6.477,61.595 7.366,60.706 7.366,55.753 9.217,53.902 9.217,43.615 v1(9.906,42.926)
LED1: IC8.28 P?.10 R2.1 | length 47.5
  Top Layer w0.254: v1(22.733,43.18) IC8.28 ; v1(49.276,42.926) 49.361,43.011 49.775,43.011 50.66,43.896 R2.1
  Bottom Layer w0.254: v1(22.733,43.18) 24.003,44.45 47.752,44.45 50.927,41.275 50.927,33.655 51.562,33.02 P?.10@55.499,33.02
LED2: IC8.26 P?.11 R4.1 | length 41.1
  Top Layer w0.254: IC8.26 25.302,44.287 26.235,44.287 26.803,43.719 v1(27.686,43.719) ; v1(49.16,41.402) R4.1
  Bottom Layer w0.254: v1(27.686,43.719) 46.843,43.719 50.419,40.143 50.419,33.401 53.34,30.48 P?.11
LED3: IC8.25 P?.12 R6.1 | length 40.6
  Top Layer w0.254: IC8.25 26.502,43.066 26.803,42.765 v1(26.924,42.765) ; v1(49.149,38.608) R6.1
  Bottom Layer w0.254: v1(26.924,42.765) 35.795,42.765 36.018,42.988 44.769,42.988 v1(49.149,38.608) 49.891,37.866 49.891,33.167 P?.12
LED4: IC8.24 P?.13 R9.1 | length 40.8
  Top Layer w0.254: IC8.24 25.266,41.783 v1(27.686,41.783) ; v1(49.16,35.814) R9.1
  Bottom Layer w0.254: v1(27.686,41.783) 43.191,41.783 v1(49.16,35.814) 49.16,33.18 53.721,28.619 53.721,26.797 P?.13
NetD?_2: D?.2 K?.2 Q?.3 | length 14
  Top Layer w0.254: Q?.3 38.338,39.608 38.884,40.154 38.884,41.076 38.88,41.08 D?.2 39.37,43.416 K?.2
NetJ?_1: J?.1@49.739,77.978 K?.4 | length 15.5
  Bottom Layer w1: J?.1@49.739,77.978 49.739,64.988 51.37,63.357 K?.4
NetJ?_2: J?.2@44.739,77.978 K?.1 | length 29.3
  Bottom Layer w1: J?.2@44.739,77.978 44.739,49.807 45.37,49.176 K?.1
NetJ?_3: J?.3@39.739,77.978 K?.3 | length 15
  Bottom Layer w1: K?.3 39.37,63.376 39.739,63.745 J?.3@39.739,77.978
NetLED1_1: LED1.1 R2.2 | length 3.4
  Top Layer w0.254: LED1.1 R2.2
NetLED3_1: LED3.1 R4.2 | length 3.4
  Top Layer w0.254: LED3.1 R4.2
NetLED5_1: LED5.1 R6.2 | length 3.4
  Top Layer w0.254: LED5.1 R6.2
NetLED7_1: LED7.1 R9.2 | length 3.4
  Top Layer w0.254: LED7.1 R9.2
NetQ?_1: Q?.1 R?.2 | length 4.4
  Top Layer w0.254: R?.2@32.488,35.814 34.568,35.814 34.544,35.838 34.544,37.459 34.693,37.608 Q?.1
PULS2: C3.2 IC8.23 R7.1 S2.1 | length 31.4
  Top Layer w0.254: IC8.23 26.911,40.526 v1(26.924,40.513) ; R7.1 C3.2 ; C3.2@34.723,32.512 C3.2 ; S2.1 38.458,30.861 35.924,30.861 34.688,32.097 C3.2
  Bottom Layer w0.254: v1(26.924,40.513) 38.989,40.513 40.074,39.428 S2.1
PULS3: C4.2 IC8.22 R8.1 S3.1 | length 33.1
  Top Layer w0.254: IC8.22 27.656,39.256 v1(27.685,39.285) ; R8.1 C4.2 34.688,28.922 35.924,27.686 39.127,27.686 39.168,27.727 39.769,27.727 S3.1
  Bottom Layer w0.254: v1(27.685,39.285) 27.713,39.258 37.323,39.258 38.3,38.281 38.3,29.806 S3.1
PW-CM: IC8.30 P?.6 | length 38.8
  Top Layer w0.254: v1(20.193,44.45) IC8.30
  Bottom Layer w0.254: v1(20.193,44.45) 22.225,46.482 51.816,46.482 P?.6
RELAY_1: IC8.21 R?.1@29.488,35.814 | length 5.1
  Top Layer w0.254: IC8.21 26.53,37.986 28.656,35.86 29.442,35.86 R?.1@29.488,35.814
RST_0: IC3_RS485-0.2 IC3_RS485-0.3 IC8.38 R16_RS485-0.2 | length 20.8
  Top Layer w0.254: v1(9.144,59.61) IC3_RS485-0.2 IC3_RS485-0.3 10.414,57.581 10.86,57.135 10.86,55.331 R16_RS485-0.2 ; IC8.38@10.033,45.72 v1(10.033,47.752)
  Bottom Layer w0.254: v1(9.144,59.61) 9.133,59.61 8.255,58.732 8.255,55.88 10.033,54.102 v1(10.033,47.752)
RST_1: IC3_RS485-1.2 IC3_RS485-1.3 IC8.35 R16_RS485-1.2 | length 20.6
  Top Layer w0.254: IC8.35@13.843,45.72 IC8.35 v1(13.843,47.752) ; v1(14.997,59.586) 14.991,59.581 14.991,58.044 IC3_RS485-1.2 IC3_RS485-1.3 16.256,56.098 16.764,55.59 R16_RS485-1.2 R16_RS485-1.2@16.532,55.522
  Bottom Layer w0.254: v1(13.843,47.752) 13.843,58.598 14.746,59.501 14.912,59.501 v1(14.997,59.586)
RST_2: IC8.32 P?.7 | length 42.8
  Top Layer w0.254: v1(17.653,44.196) IC8.32
  Bottom Layer w0.254: v1(17.653,44.196) 18.288,43.561 20.447,43.561 22.86,45.974 49.784,45.974 P?.7
RX_0: IC3_RS485-0.1 IC8.36 R14_RS485-0.2 | length 18.9
  Top Layer w0.254: IC3_RS485-0.1@7.874,57.799 7.874,57.581 9.321,56.134 v1(9.398,56.134) 9.398,52.983 9.779,52.602 R14_RS485-0.2 ; IC8.36@12.573,45.72 v1(12.573,47.752)
  Bottom Layer w0.254: v1(9.398,56.134) 12.573,52.959 v1(12.573,47.752)
RX_1: IC3_RS485-1.1 IC8.11 R14_RS485-1.2 | length 36.1
  Top Layer w0.254: IC3_RS485-1.1 13.716,56.918 13.865,56.769 14.732,56.769 15.251,56.25 v1(15.251,52.601) 15.273,52.623 R14_RS485-1.2 ; IC8.11@20.193,28.746 v1(20.193,30.48)
  Bottom Layer w0.254: v1(15.251,52.601) 15.81,52.042 15.81,46.671 14.224,45.085 14.224,44.069 21.082,37.211 21.082,31.369 v1(20.193,30.48)
RX_2: IC8.33 P?.9 | length 48.4
  Top Layer w0.254: v1(16.383,43.18) IC8.33
  Bottom Layer w0.254: v1(16.383,43.18) 17.018,42.545 20.955,42.545 23.368,44.958 48.387,44.958 51.562,41.783 51.562,39.116 P?.9
SCL: IC8.17 P2.3 P3.3 | length 50.3
  Top Layer w0.254: IC8.17 26.784,32.906 27.686,32.004 27.686,28.873 25.148,26.334 22.143,26.334 P2.3 20.574,21.59 22.225,19.939 49.657,19.939 50.038,20.32 P3.3
SDA: IC8.16 P2.4 P3.4 | length 53.1
  Top Layer w0.254: IC8.16 26.648,31.636 26.797,31.487 26.797,28.702 24.937,26.842 21.889,26.842 21.336,26.289 18.669,26.289 18.127,25.747 18.127,24.858 P2.4 18.034,23.368 21.971,19.431 49.149,19.431 50.8,17.78 P3.4
TX_0: IC3_RS485-0.4 IC8.37 R18_RS485-0.1 | length 13.7
  Top Layer w0.254: IC8.37@11.303,45.72 11.303,47.498 10.922,47.879 R18_RS485-0.1 11.811,49.935 12.192,50.316 12.192,56.261 11.684,56.769 IC3_RS485-0.4
TX_1: IC3_RS485-1.4 IC8.10 R18_RS485-1.1 | length 36.3
  Top Layer w0.254: v1(14.968,49.276) 15.753,50.061 16.659,50.061 R18_RS485-1.1 17.885,49.956 18.034,50.105 18.034,56.433 17.526,56.941 IC3_RS485-1.4 ; IC8.10@18.923,28.474 v1(18.923,30.48)
  Bottom Layer w0.254: v1(14.968,49.276) 14.968,46.718 13.716,45.466 13.716,43.815 20.32,37.211 20.32,31.877 v1(18.923,30.48)
TX_2: IC8.34 P?.8 | length 46.7
  Top Layer w0.254: v1(15.113,44.577) IC8.34
  Bottom Layer w0.254: v1(15.113,44.577) 16.129,44.577 17.653,43.053 20.701,43.053 23.114,45.466 48.641,45.466 52.12,41.987 52.12,41.098 P?.8
USB_D+: IC8.14 P1.4 | length 42.1
  Top Layer w0.254: v1(7.874,32.893) 9.017,31.75 21.717,31.75 24.003,29.464 IC8.14@24.003,28.22
  Bottom Layer w0.254: P1.4 6.858,53.975 7.874,52.959 v1(7.874,32.893)
USB_D-: IC8.13 P1.5 | length 39.8
  Top Layer w0.254: v1(7.112,31.242) 21.336,31.242 22.733,29.845 IC8.13@22.733,28.22
  Bottom Layer w0.254: P1.5 6.604,51.435 7.112,50.927 v1(7.112,31.242)
pads on no net: IC8.18 IC8.19 IC8.20 IC8.29 IC8.39
copper on no net: | length 0
  Top Layer w0.4: v3@7.1,16.5 v3@7.105,16.505
  other v3: 4.2,16 7.1,16 4.2,66 56.9,66

## Polygon pours and split planes (outlines as drawn)
GND on Top Layer "NONET_L01_P000" (solid, shelved, pour order 0): 0,82.042 0,0 57.023,0 57.023,82.042
GND on Bottom Layer "NONET_L02_P001" (solid, shelved, pour order 1): 0,0 57.023,0 57.023,82.042 0,82.042

## Silkscreen, mask and mechanical layers (free items; w line width, h text height)
Top Overlay:
  lines w0.254: -2.464,41 0.003,41 ; 32,-3.613 32,0
  lines w0.4: 64,0 0,0 ; 0,0 0,82 57,82 57,0 0,0 ; 0,81.365 0,81.365
Bottom Overlay:
  drawing of 954 lines, arcs and shapes, not listed
  text "V2.23" at 20.484,60.56 h1.52
  text "WWW.INELCOINGENIERIA.COM.AR" at 35.013,58.502 h1.52

## Dimensions
-2.464,41 to 4.2,16 on Top Overlay
4.2,66 to -2.464,41 on Top Overlay
34.499,4.004 to 32,-3.613 on Top Overlay
0,82 to 0,0 on Top Overlay
0,0 to 64,0 on Top Overlay
7.1,16 to 0,0 on Top Overlay
4.2,16 to 0,0 on Top Overlay
0,0 to 57,0 on Top Overlay